# Altium PCB PCB1.PcbDoc
Units mil, origin at the board's own origin, x right, y up, seen from the top; angles counter-clockwise.
Board outline 2225 x 3575 mil, 4 copper layers (Top Layer, Internal Plane 1, Internal Plane 2, Bottom Layer); 1 components, 19 nets, 20 pads, 4 vias.
Unrouted connection lines stored in the file: 1.
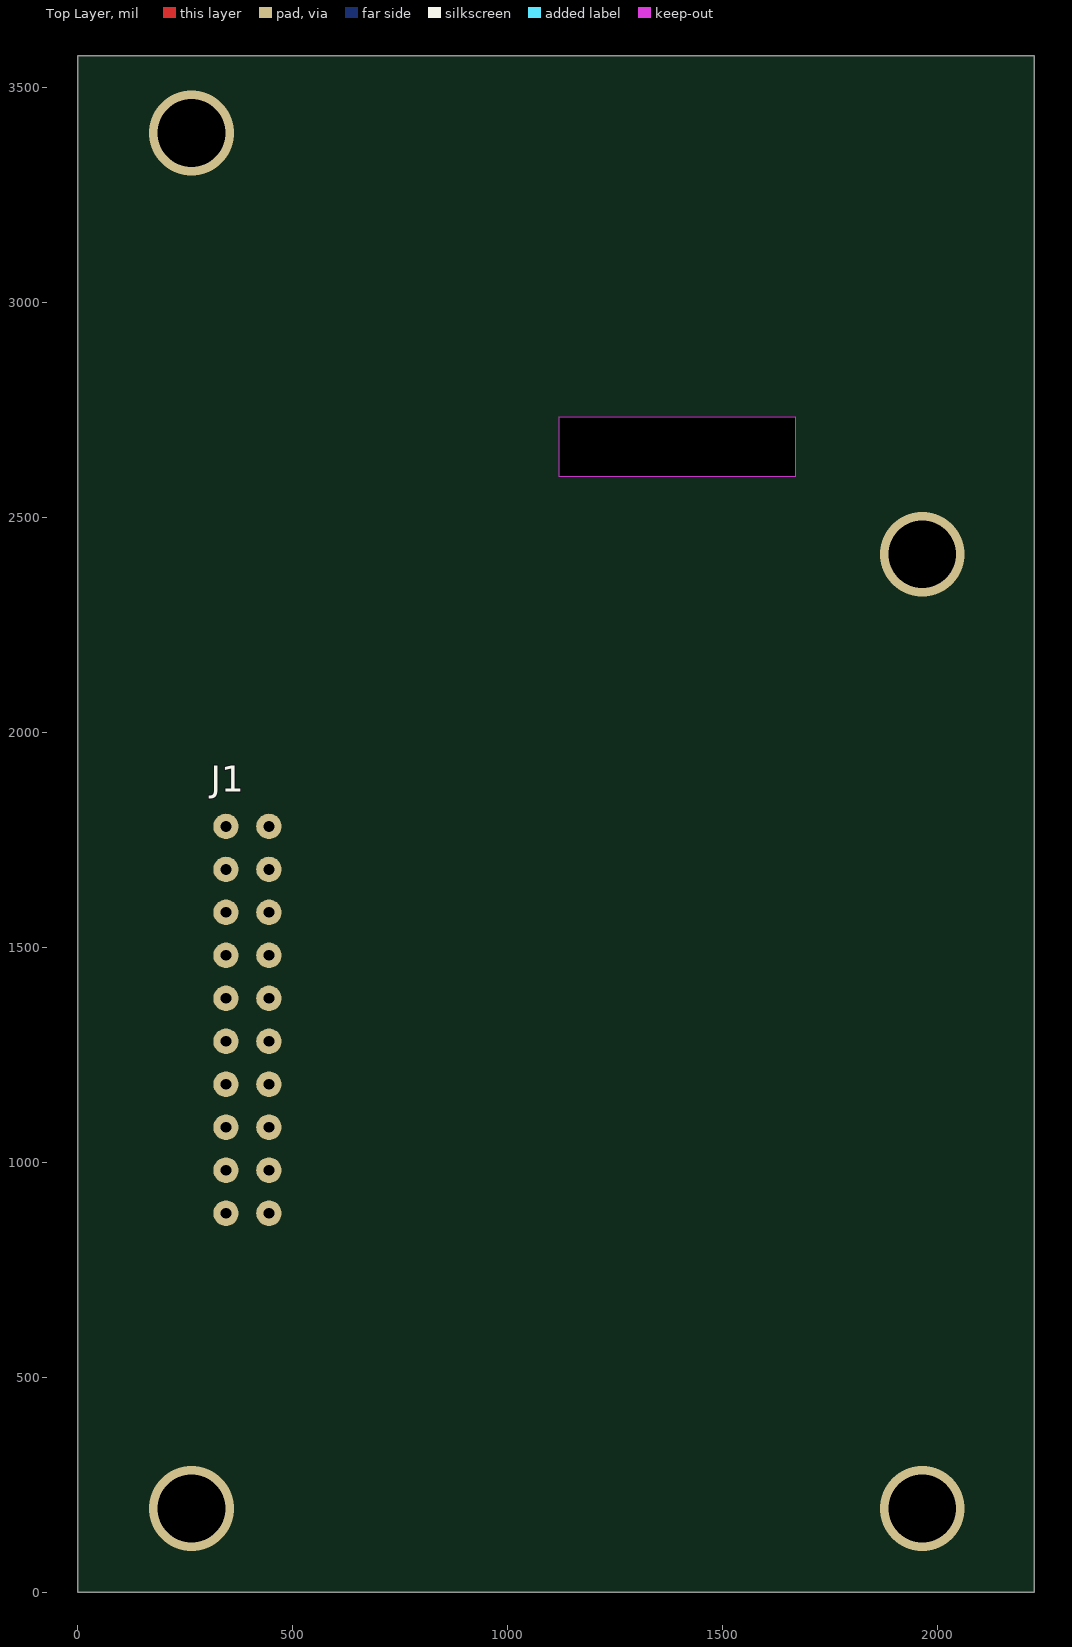
[diagram p0: Top Layer view]
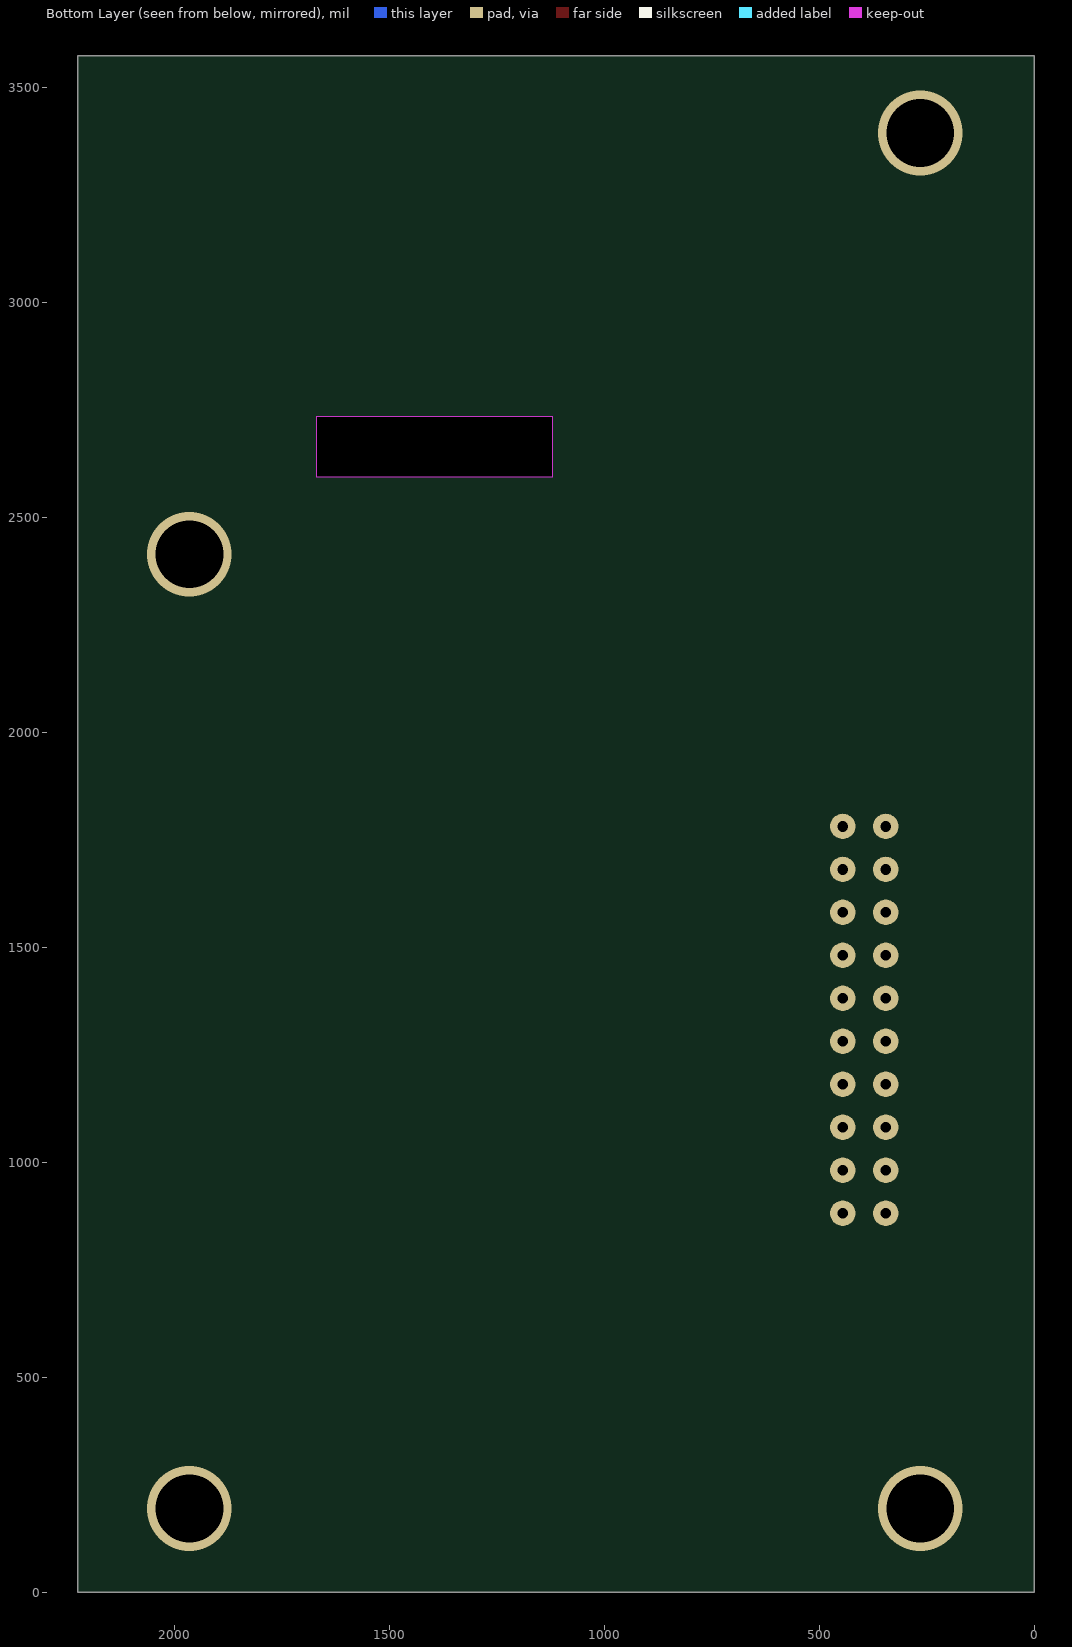
[diagram p1: Bottom Layer view, seen from below]
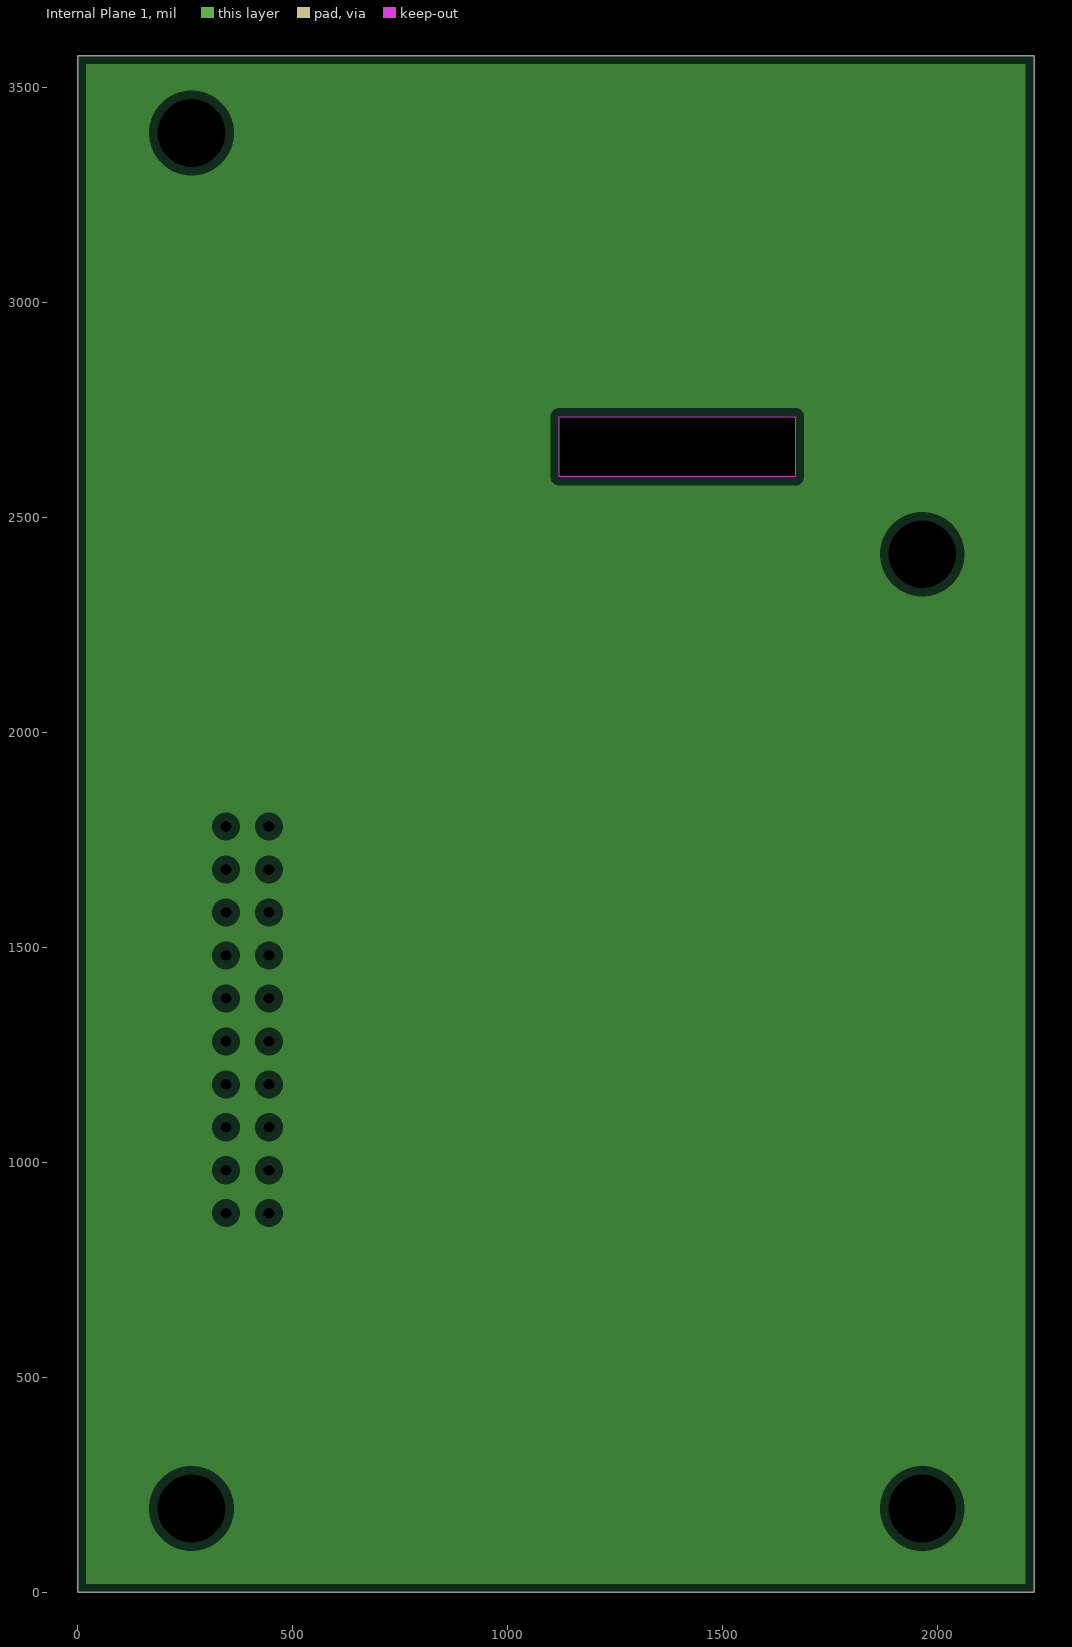
[diagram p2: Internal Plane 1, clearances drawn from the general rule]
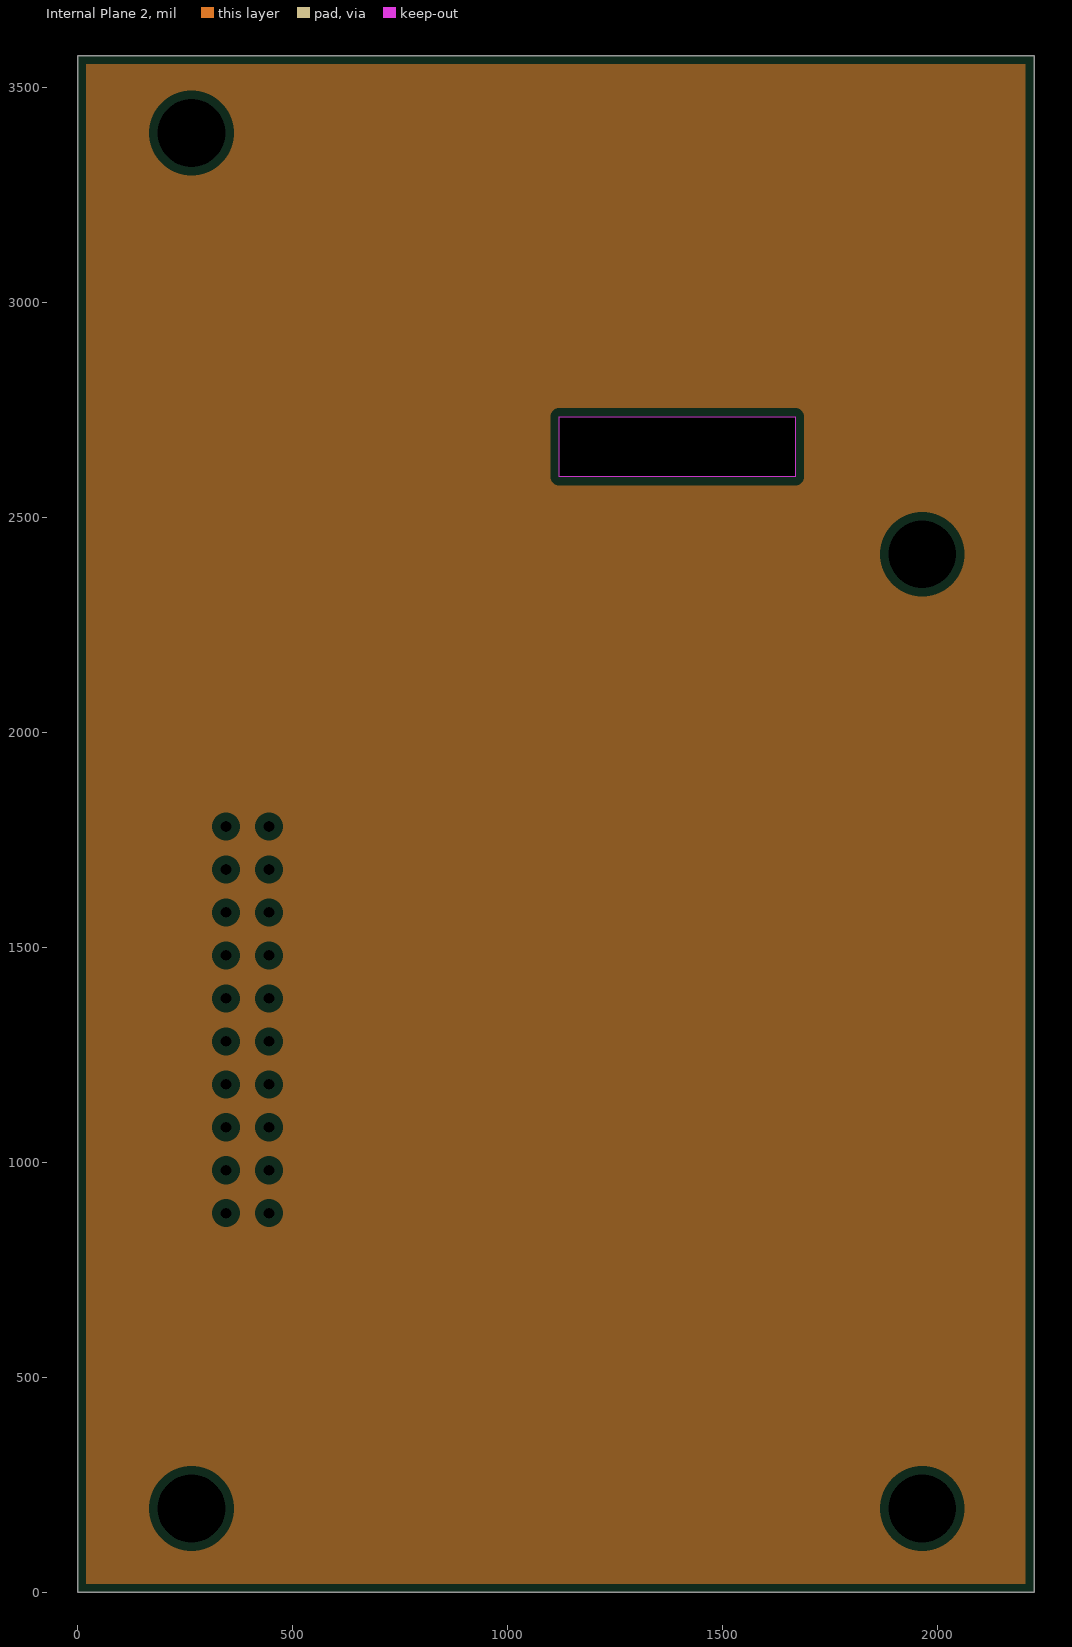
[diagram p3: Internal Plane 2, clearances drawn from the general rule]

## Layer stack, top to bottom
Top Solder: solder mask 0.4, Solder Resist, Dk 3.5
Top Layer: signal copper 1.4
Dielectric 1: dielectric 12.6, FR-4, Dk 4.8
Internal Plane 1: plane copper 1.4
Dielectric2: dielectric 12.6, FR-4, Dk 4.8
Internal Plane 2: plane copper 1.4
Dielectric3: dielectric 12.6, FR-4, Dk 4.8
Bottom Layer: signal copper 1.4
Bottom Solder: solder mask 0.4, Solder Resist, Dk 3.5

## Board outline
0,0 0,3575 2225,3575 2225,0
cut-out: 1120,2595 1120,2735 1670,2735 1670,2595

## Design rules (kind name [scope] priority, off if disabled: settings)
Clearance [All] p1: gap=10 ignorepadtopadclearanceinfootprint=FALSE except(0: Arc-Hole Track-Hole SMDPad-Hole THPad-Hole Via-Hole Fill-Hole Poly-Hole Region-Hole Text-Hole)
PlaneClearance [All] p1: clearance=20
PlaneConnect [All] p1: planeconnectstyle=Relief reliefexpansion=20 reliefentries=4 reliefconductorwidth=10 reliefairgap=10
PolygonConnect [All] p1: connectstyle=Relief reliefconductorwidth=10 reliefentries=4 polygonreliefangle="90 Angle" airgapwidth=10
RoomDefinition HAT [InComponentClass('HAT')] p1: confinementstyle=ConfineIn formatcopy=TRUE lockcomponents=FALSE outline 290,828 500,828 500,1943 290,1943
RoutingVias [All] p1: holewidth=28 width=50 viastyle="Through Hole" minholewidth=28 minwidth=50 maxholewidth=28 maxwidth=50
SolderMaskExpansion [All] p1: expansion=4 istentingtop=FALSE
Width [All] p1: maxlimit=10 minlimit=10 preferedwidth=10
28 further rules are at their usual default settings.

## Components (designator, comment, footprint, x,y, rotation, side; value= is the part's Value field where it differs from the comment)
J1 "PH2-20-UA" PH2-20-UA-BottomFootprint 395,1332 r0 top

## Footprints (in the part's own frame and the unit in brackets; to place one, negate y for a bottom-side part, rotate by r counter-clockwise, add the part's x,y. Pads: shape width x height; smd on the part's side, far side on the other; paste and mask are expansions set on the pad)
PH2-20-UA-BottomFootprint [mm] "Male Header 2 x 10 - 2.54mm Pitch - Bottom Board"
  round 1.5 hole 0.64: 1(-1.27,11.43) 2(-1.27,8.89) 3(-1.27,6.35) 4(-1.27,3.81) 5(-1.27,1.27) 6(-1.27,-1.27) 7(-1.27,-3.81) 8(-1.27,-6.35) 9(-1.27,-8.89) 10(-1.27,-11.43) 11(1.27,11.43) 12(1.27,8.89) 13(1.27,6.35) 14(1.27,3.81) 15(1.27,1.27) 16(1.27,-1.27) 17(1.27,-3.81) 18(1.27,-6.35) 19(1.27,-8.89) 20(1.27,-11.43)
  body extent -2.41,-12.7 2.42,12.7, height 8.39

## Part data
J1: library part CMP-001-0232-1, "Male Header 2 x 10 - 2.54mm Pitch", Pin Count=20

## Via types
v1: diameter 196.85, hole 157.48, Top Layer to Bottom Layer, 4 vias

## Nets (pads, with @x,y where several pads share a name; then routed paths per layer and width w, separated by ;. In a path a pad name is that pad's centre, name@x,y a point inside that pad or via, vN(x,y) a via of type N, cw(c..) or ccw(c..) an arc to the next point about the centre after c; other vN are vias at no path point)
3v3: J1.11
GND: J1.10 J1.20
HSPI_CLK: J1.15
HSPI_CS0: J1.18
HSPI_MISO: J1.6
HSPI_MOSI: J1.16
HSPI_WP: J1.8
IO25: J1.4
IO26: J1.14
IO27: J1.5
IO32: J1.3
IO33: J1.13
IO34: J1.2
IO35: J1.12
RXD0: J1.19
SCL: J1.17
SDA: J1.7
TXD0: J1.9
VIN: J1.1
copper on no net:
  other v1: 265,195 1965,195 1965,2415 265,3395

## Polygon pours and split planes (outlines as drawn)
no net on Internal Plane 1 (split plane): 2204.9,20.1 20.1,20.1 20.1,3554.9 2204.9,3554.9
no net on Internal Plane 2 (split plane): 2204.9,20.1 20.1,20.1 20.1,3554.9 2204.9,3554.9